# Altium PCB MicroPlayerPCB.PcbDoc
Units mm, origin at the board's own origin, x right, y up, seen from the top; angles counter-clockwise.
Board outline 26 x 30 mm, 4 copper layers (Top Layer 1, Top Layer 2, Bottom Layer 2, Bottom Layer 1), stack 0.682 mm thick; 71 components, 67 nets, 303 pads, 148 vias.
Unrouted connection lines stored in the file: 3.
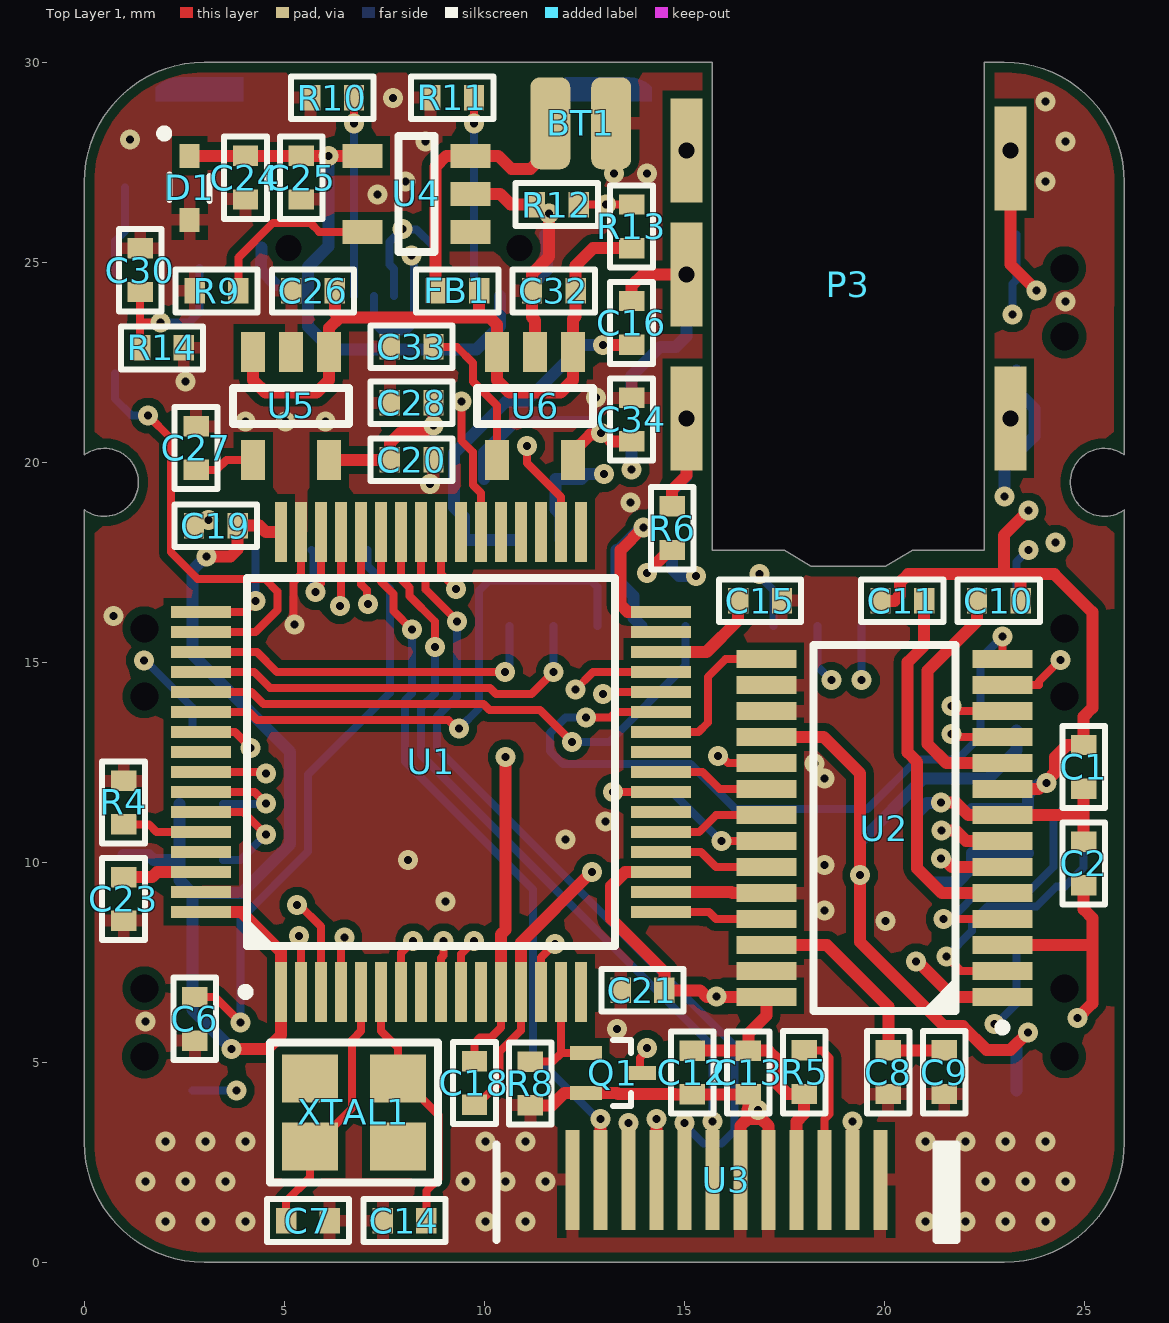
[diagram p0: Top Layer 1 view]
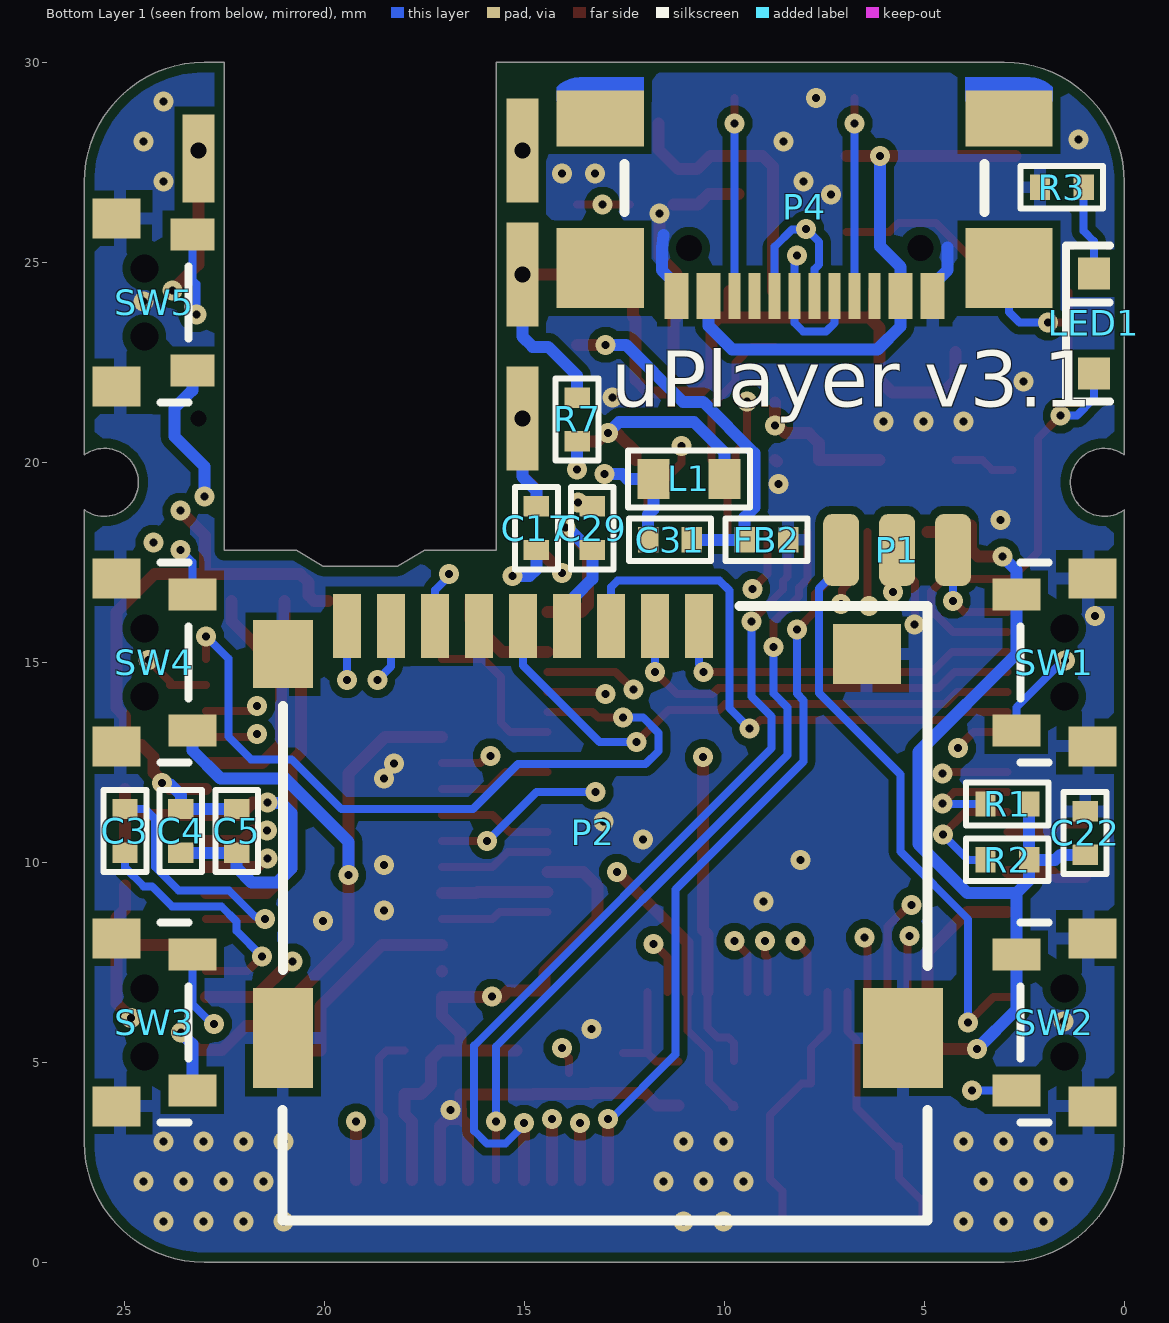
[diagram p1: Bottom Layer 1 view, seen from below]
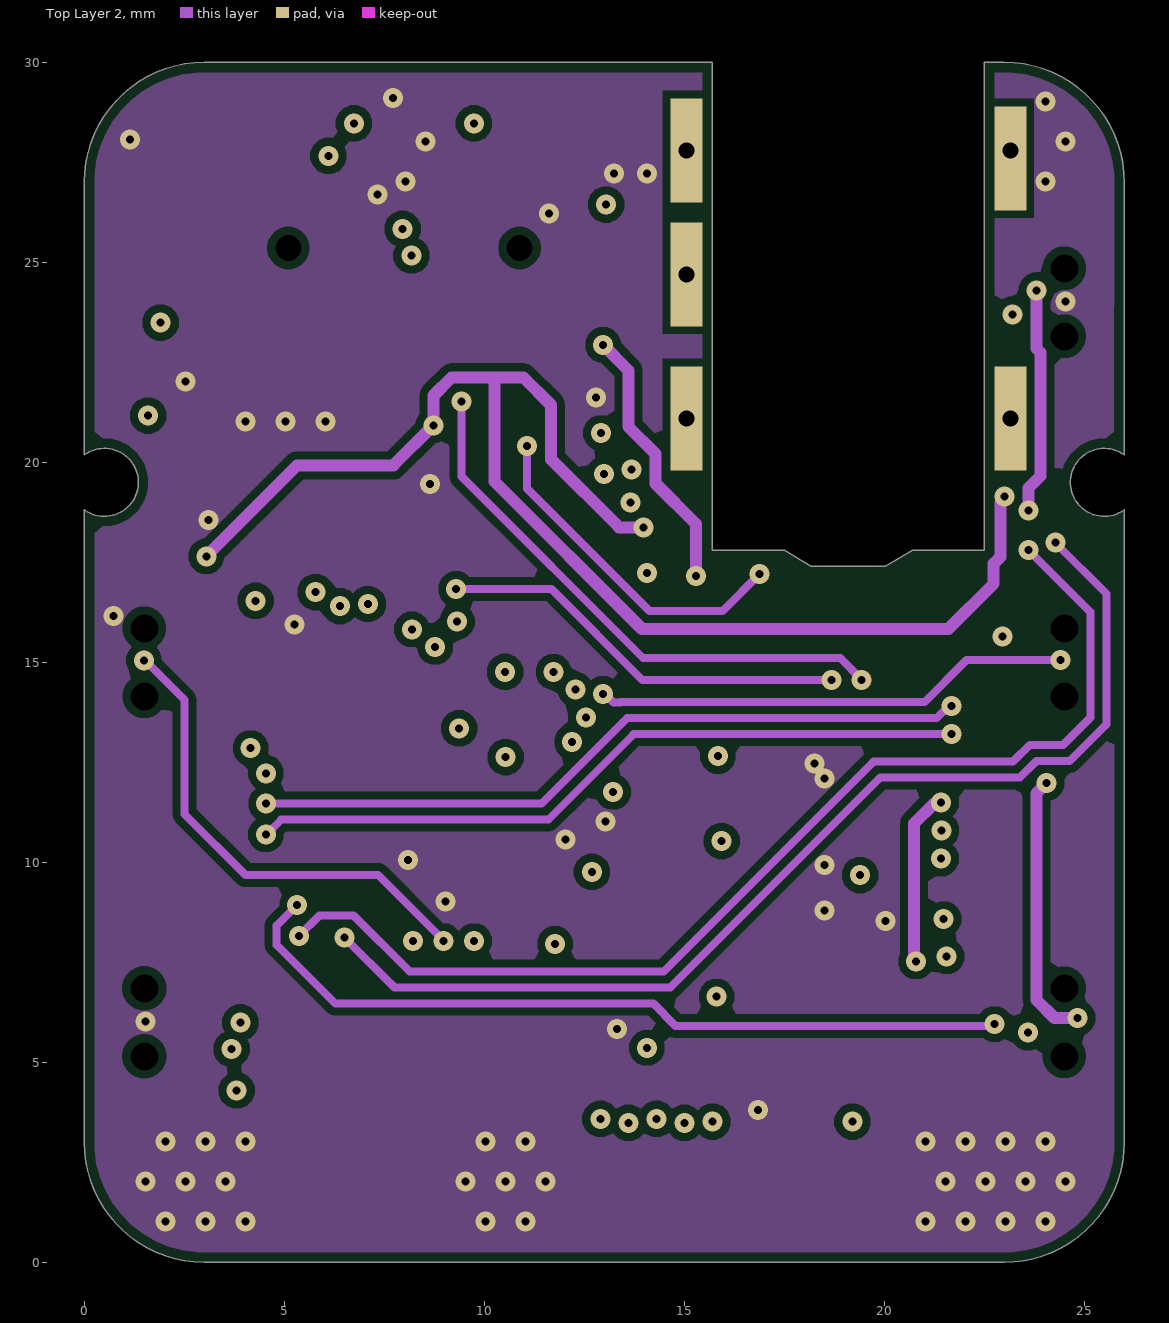
[diagram p2: Top Layer 2]
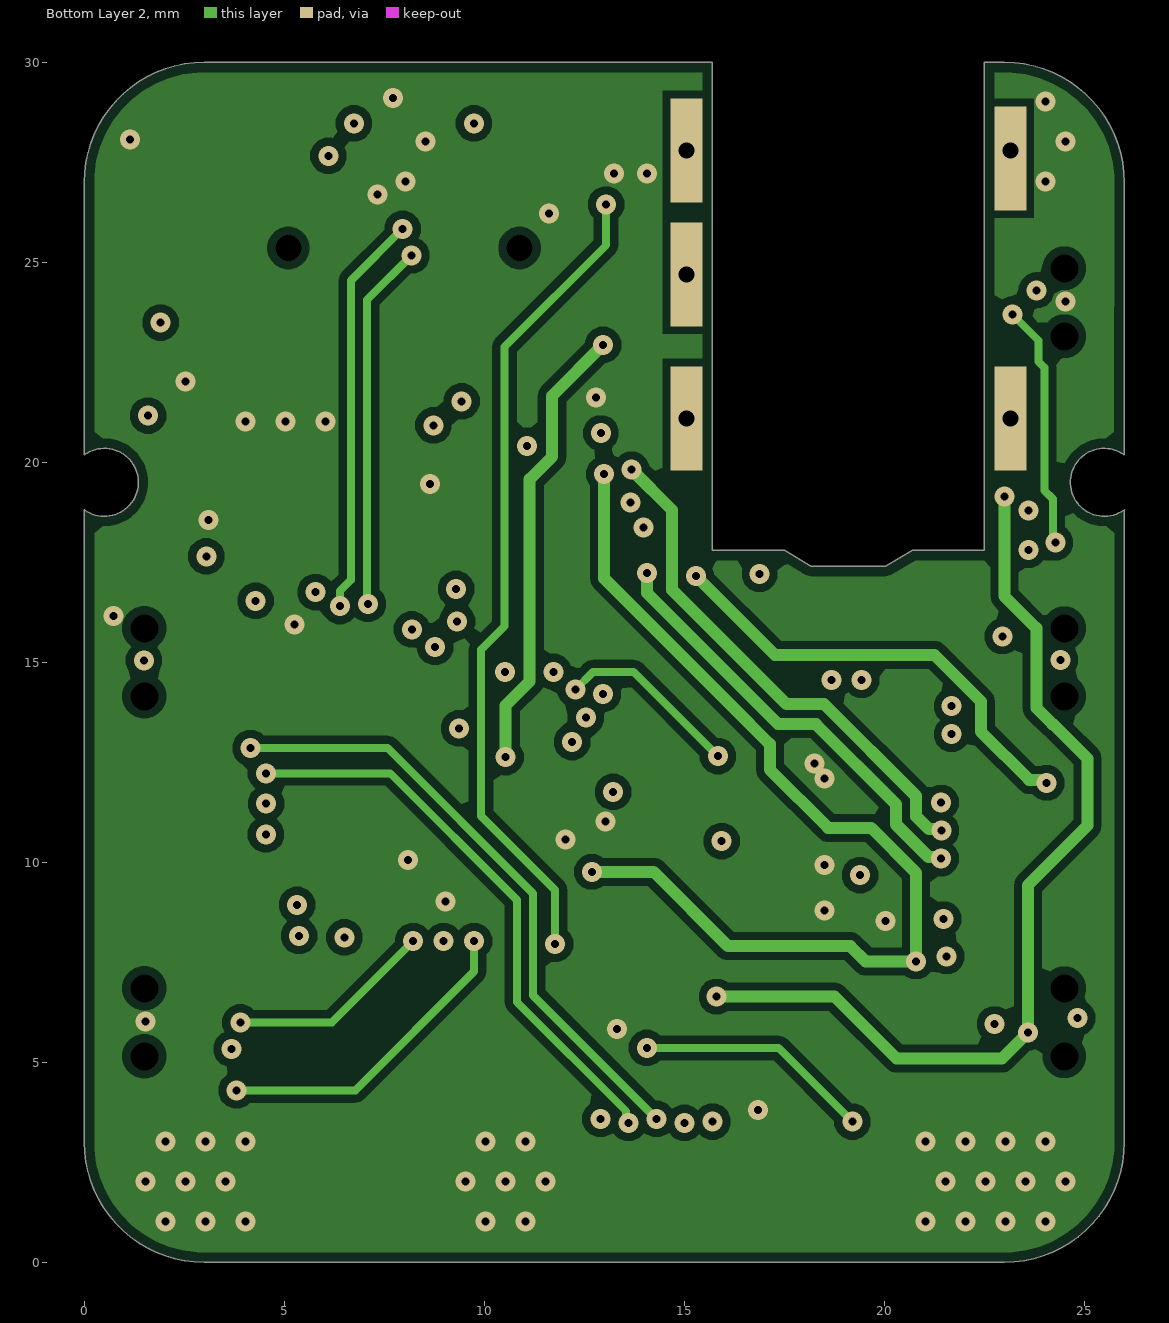
[diagram p3: Bottom Layer 2]
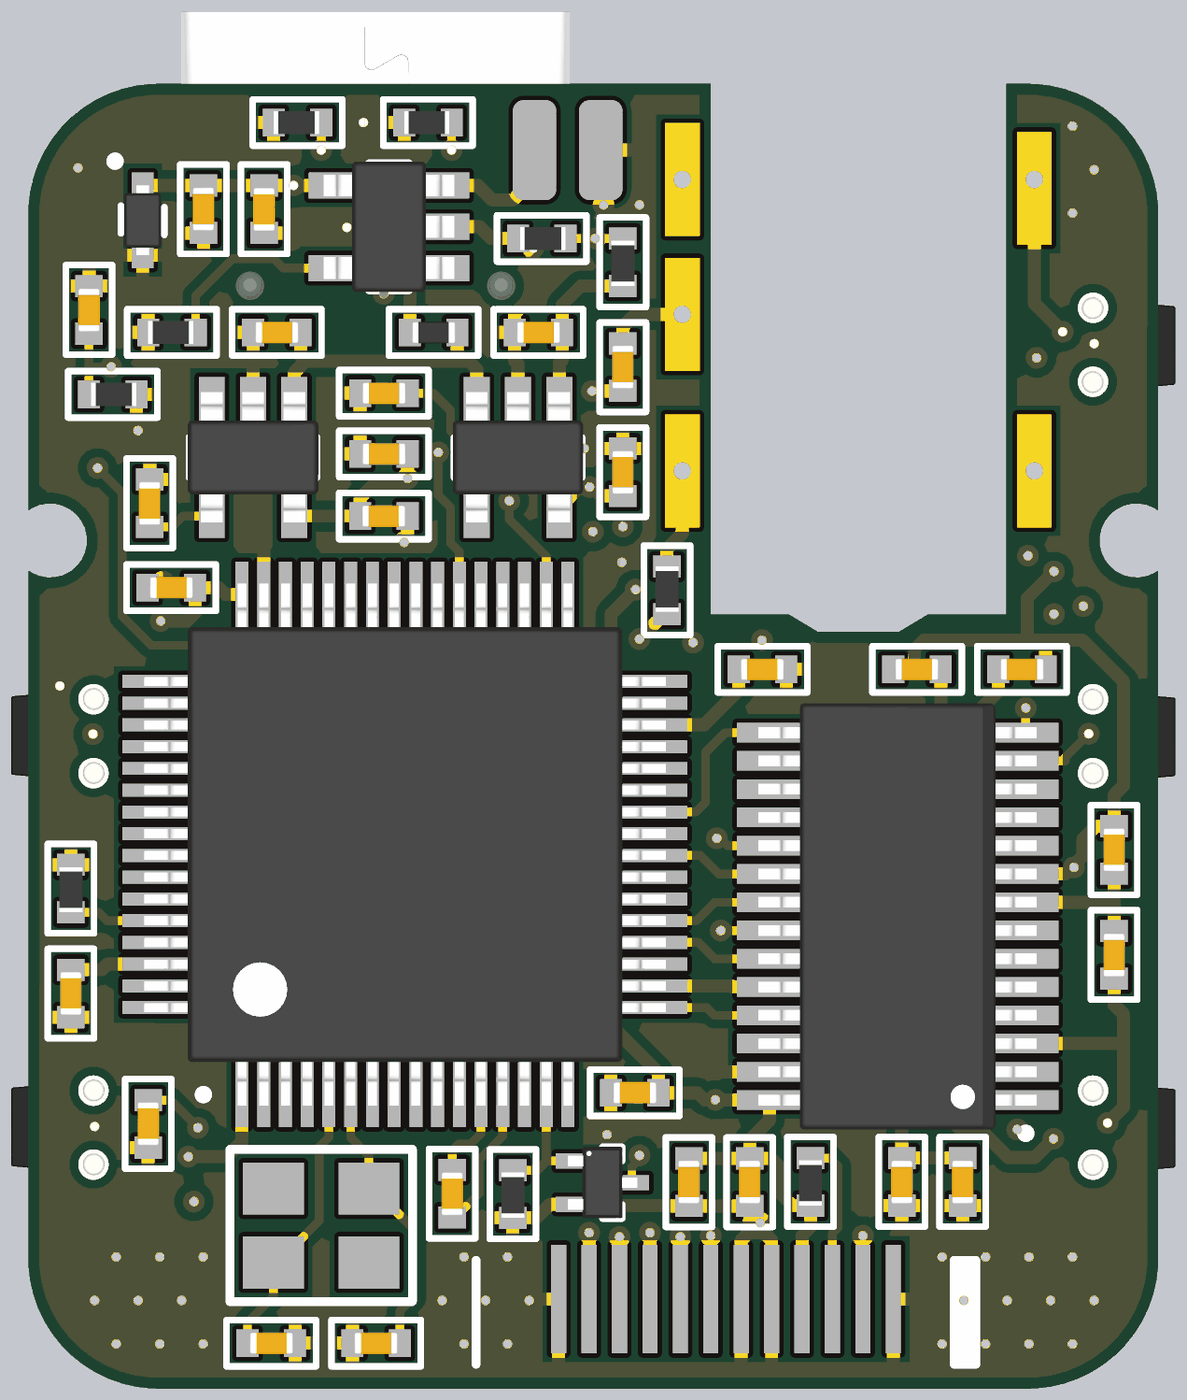
[diagram p4: 3D render of the assembled board from above, using the file's embedded part models]
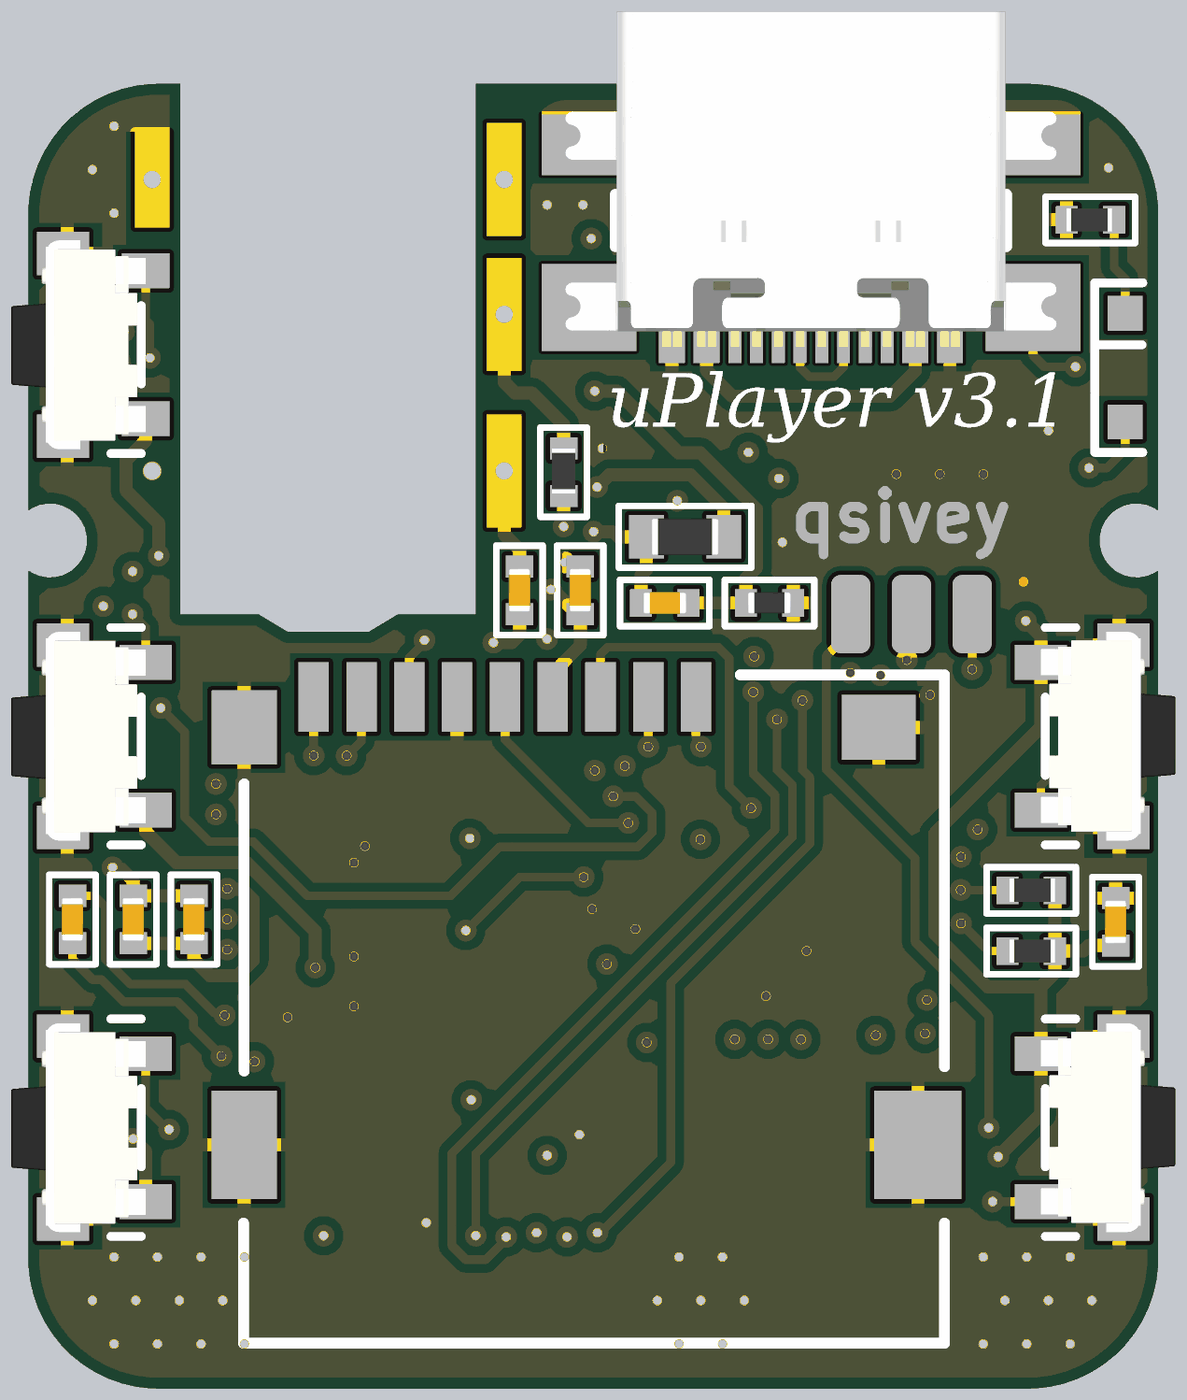
[diagram p5: 3D render of the assembled board from below, using the file's embedded part models]

## Layer stack, top to bottom
Top Solder: solder mask 0.01, Solder Resist, Dk 3.5
Top Layer 1: signal copper 0.035
Dielectric 2: prepreg 0.0711, PP-006, Dk 4.1
Top Layer 2: signal copper 0.035
Dielectric 1: dielectric 0.4, FR-4, Dk 4.8
Bottom Layer 2: signal copper 0.035
Dielectric 3: prepreg 0.0711, PP-006, Dk 4.1
Bottom Layer 1: signal copper 0.035
Bottom Solder: solder mask 0.01, Solder Resist, Dk 3.5

## Board outline
3,0 cw(c3,3) 0,3 0,18.808 0.006,18.808 ccw(c0.5,19.5) 0.006,20.192 0,20.192 0,27 cw(c3,27) 3,30 15.7,30 15.7,17.8 17.5,17.8 18.167,17.4 20.033,17.4 20.7,17.8 22.5,17.8 22.5,30 23,30 cw(c23,27) 26,27 26,20.192 25.994,20.192 ccw(c25.5,19.5) 25.994,18.808 26,18.808 26,3 cw(c23,3) 23,0

## Design rules (kind name [scope] priority, off if disabled: settings)
AssemblyTestPointUsage [All] p1 off:
AssemblyTestpoint [All] p1 off: testpointundercomponent=TRUE minsize=1.016 maxsize=2.54 preferedsize=1.524 minholesize=0 maxholesize=1.016 preferedholesize=0.813 testpointgrid=0.025 usegrid=TRUE gridtolerance=0 allowsidetop=TRUE allowsidebottom=TRUE
BoardOutlineClearance [All] p1: gap=0.25 ignorepadtopadclearanceinfootprint=FALSE
Clearance [All] p1: gap=0.2 ignorepadtopadclearanceinfootprint=FALSE
ComponentClearance [All] p1 off: gap=0 collisioncheckmode=3 verticalgap=0 showdistances=FALSE
DiffPairsRouting [All] p1 off: maxlimit=0.254 minlimit=0.254 mostfreqgap=0.254 toplayer_minwidth=0.381 toplayer_maxwidth=0.381 toplayer_prefwidth=0.381 midlayer1_minwidth=0.381 midlayer1_maxwidth=0.381 midlayer1_prefwidth=0.381 midlayer2_minwidth=0.381 midlayer2_maxwidth=0.381 midlayer2_prefwidth=0.381 bottomlayer_minwidth=0.381 bottomlayer_maxwidth=0.381 bottomlayer_prefwidth=0.381 maxuncoupledlength=12.7
FabricationTestPointUsage [All] p1 off: valid=0 allowmultiple=FALSE
FabricationTestpoint [All] p1 off: side=3 testpointundercomponent=TRUE minsize=1.016 maxsize=2.54 preferedsize=1.524 minholesize=0 maxholesize=1.016 preferedholesize=0.813 testpointgrid=0.025 allowsidetop=TRUE allowsidebottom=TRUE usegrid=TRUE gridtolerance=0
FanoutControl Fanout_BGA [IsBGA] p1 off: bgadir=Out bgaviamode=Centered fanoutstyle=Auto fanoutdirection=Alternating viagrid=0.025 // Fanout_BGA (Default Rule)
Height [All] p1: minheight=0 maxheight=100 prefheight=0.5
HoleSize [All] p1: absolutevalues=TRUE maxlimit=100 minlimit=0.2 maxpercent=80.000 minpercent=20.000
HoleToHoleClearance [All] p1: gap=0.2 allowstackedmicrovias=TRUE
MinimumAnnularRing [All] p1: minimumring=0.15
MinimumSolderMaskSliver [All] p1: minsoldermaskwidth=0
PlaneClearance [All] p1: clearance=0.3
PlaneConnect [All] p1: planeconnectstyle=Relief reliefexpansion=0.5 reliefentries=4 reliefconductorwidth=0.3 reliefairgap=0.3
PolygonConnect PolygonConnectVias [InNet('DGND') vs isVia] p1: connectstyle=Direct reliefconductorwidth=0.254 reliefentries=4 polygonreliefangle="90 Angle" airgapwidth=0.254
PolygonConnect [All] p2: connectstyle=Relief reliefconductorwidth=0.3 reliefentries=4 polygonreliefangle="90 Angle" airgapwidth=0.2
RoutingCorners [All] p1: cornerstyle=45-Degree minsetback=0.635 maxsetback=0.635
RoutingVias [All] p1: holewidth=0.4 width=0.8 viastyle="Through Hole" minholewidth=0.2 minwidth=0.5 maxholewidth=0.5 maxwidth=1
SMDEntry [All] p1: side=TRUE corner=TRUE anyangle=FALSE
SMDNeckDown [All] p1: percent=100.000
SMDToCorner [All] p1: distance=39370
SilkToSilkClearance [All] p1: silktosilkclearance=0.2
SilkToSolderMaskClearance [IsPad] p1: minsilkscreentomaskgap=0.03 clearancetoexposedcopper=FALSE
SolderMaskExpansion SolderMaskExpansionVias [isVia] p1: expansion=0.102 istentingtop=TRUE
SolderMaskExpansion [All] p2: expansion=0.102 istentingtop=FALSE
Width [All] p1: maxlimit=1 minlimit=0.2 preferedwidth=0.3
10 further rules are at their usual default settings.

## Components (designator, comment, footprint, x,y, rotation, side; value= is the part's Value field where it differs from the comment)
BT1 "3.7V" _2-PAD-SM 11.649,28.476 r0 top
C1 "10uF" C0402 24.984,11.839 r90 top
C2 "100nF" C0402 24.984,10.518 r270 top
C3 "2.2uF" C0402 24.984,10.239 r90 bottom
C4 "10uF" C0402 23.587,10.239 r90 bottom
C5 "100nF" C0402 22.19,10.239 r90 bottom
C6 "100nF" C0402 2.759,5.54 r90 top
C7 "12pF" C0402 5.045,1.044 r0 top
C8 "10uF" C0402 20.1,5.3 r270 top
C9 "100nF" C0402 21.5,5.3 r270 top
C10 "10uF" C0402 22.317,16.538 r0 top
C11 "2.2uF" C0402 20.996,16.538 r180 top
C12 "10uF" C0402 15.2,4.2 r90 top
C13 "100nF" C0402 16.6,4.2 r90 top
C14 "12pF" C0402 8.55,1.044 r180 top
C15 "2.2uF" C0402 17.44,16.538 r180 top
C16 "2.2nF" C0402 13.681,22.939 r90 top
C17 "2.2nF" C0402 14.697,17.808 r90 bottom
C18 "100nF" C0402 9.754,5.029 r270 top
C19 "100nF" C0402 2.743,18.415 r0 top
C20 "100nF" C0402 8.728,20.061 r180 top
C21 "100nF" C0402 13.408,6.8 r0 top
C22 "100nF" C0402 0.981,11.28 r270 bottom
C23 "2.2uF" C0402 0.981,8.537 r90 top
C24 "100nF" C0402 4.029,26.571 r90 top
C25 "1uF" C0402 5.426,27.663 r270 top
C26 "1uF" C0402 5.172,24.285 r0 top
C27 "10nF" C0402 2.794,20.904 r270 top
C28 "1uF" C0402 7.636,21.491 r0 top
C29 "2.2uF" C0402 13.3,17.808 r90 bottom
C30 "100nF" C0402 1.397,25.349 r270 top
C31 "100nF" C0402 11.903,18.062 r180 bottom
C32 "100nF" C0402 11.192,24.285 r0 top
C33 "10nF" C0402 7.636,22.888 r0 top
C34 "1uF" C0402 13.681,21.618 r270 top
D1 "PESD5V0S1UB" SOD-523 2.632,26.063 r90 top
FB1 "EPZ1005E221-1R2T" L0402 8.779,24.285 r0 top value=100uH
FB2 "EPZ1005E221-1R2T" L0402 8.398,18.062 r0 bottom value=100uH
L1 "10uH" L0603 9.998,19.586 r0 bottom
LED1 "TO-2106BY-SWG" LED-2106-R/A 0.762,22.225 r90 bottom
P1 "P3" _3-PAD-SM 3.902,17.808 r0 bottom
P2 "microSD Card Holder" L-KLS1-TF-003 10.633,15.903 r0 bottom
P3 "ST-033" _3-PAD-TH 25.282,16.651 r270 top
P4 "USB4110-GF-A" USB-TYPE-C 4.791,24.158 r0 bottom
Q1 "2SK3019TL" SOT-416FL 12.538,5.235 r0 top
R1 "2.2K" R0402 2.39,11.459 r0 bottom
R2 "2.2K" R0402 2.39,10.062 r0 bottom
R3 "1K" R0402 2.096,26.872 r180 bottom
R4 "10K" R0402 0.982,10.962 r90 top
R5 "160" R0402 17.999,4.219 r90 top
R6 "470" R0402 14.696,18.888 r270 top
R7 "470" R0402 13.682,21.606 r270 bottom
R8 "47K" R0402 11.151,3.937 r90 top
R9 "10K" R0402 2.771,24.284 r0 top
R10 "5.1K" R0402 5.661,29.11 r0 top
R11 "5.1K" R0402 8.661,29.11 r0 top
R12 "100K" R0402 12.348,26.445 r180 top
R13 "100K" R0402 13.682,25.364 r90 top
R14 "1M" R0402 2.477,22.861 r180 top
SW1 "" BUT-SMD-4X3.5X2MM#1 2.7,16.7 r270 bottom
SW2 "" BUT-SMD-4X3.5X2MM#1 2.7,7.7 r270 bottom
SW3 "" BUT-SMD-4X3.5X2MM#1 23.3,4.3 r90 bottom
SW4 "" BUT-SMD-4X3.5X2MM#1 23.3,13.3 r90 bottom
SW5 "" BUT-SMD-4X3.5X2MM#2 23.3,22.3 r90 bottom
U1 "STM32H563RIT6" LQFP64 4.918,6.759 r90 top
U2 "PCM5142" TSSOP28 22.952,6.632 r180 top
U3 "ST7789" 1.3INCH_LCD_WELDED 19.904,2.06 r180 top
U4 "STC4054" SOT-23-5 9.65,25.763 r180 top
U5 "LD3985M33R" SOT-23-5 6.122,22.761 r270 top
U6 "LD3985M33R" SOT-23-5 12.218,22.761 r270 top
XTAL1 "16 MHz" 7U 5.039,5.1 r0 top

## Footprints (in the part's own frame and the unit in brackets; to place one, negate y for a bottom-side part, rotate by r counter-clockwise, add the part's x,y. Pads: shape width x height; smd on the part's side, far side on the other; paste and mask are expansions set on the pad)
1.3INCH_LCD_WELDED [mm]
  rect 0.35x2.5 smd: 1(0,0) 2(0.7,0) 3(1.4,0) 4(2.1,0) 5(2.8,0) 6(3.5,0) 7(4.2,0) 8(4.9,0) 9(5.6,0) 10(6.3,0) 11(7,0) 12(7.7,0)
  silkscreen extent -1.9,-0.89 9.6,1.5
7U [mm] "7U Series SMD Crystal Units"
  rect 1.4x1.2 smd: 0(0.6,-0.5) 0(2.8,-2.2) 1(0.6,-2.2) 2(2.8,-0.5)
  silkscreen extent -0.4,-3.1 3.8,0.4
_2-PAD-SM [mm]
  rrect50% 1x2.3 smd: 1(0,0) 2(1.524,0)
_3-PAD-SM [mm]
  rrect50% 0.9x1.8 smd: 1(0.381,0) 2(1.778,0) 3(3.175,0)
_3-PAD-TH [mm]
  rect 2.6x0.8 hole 0.4: 1(-4.449,-10.232) 2(-8.049,-10.232)
  rect 2.6x0.8 / inner rect 2.6x0.8 / far side rect 2.2x0.8 hole 0.4 copper offset 0.2,0: 3(-11.149,-2.132)
BUT-SMD-4X3.5X2MM#1 [mm]
  rect 1x1.2 smd: 0(-0.4,1.9) 0(3.8,1.9)
  rect 0.8x1.2 smd: 1(0,0) 2(3.4,0)
  round 0 hole 0.7 unplated: ""(0.85,1.2) ""(2.55,1.2)
  silkscreen extent -0.8,0.1 4.2,0.8, body extent -0.7,0 4.1,3.09, height 1.9
BUT-SMD-4X3.5X2MM#2 [mm]
  rect 1x1.2 smd: 0(-0.4,1.9) 0(3.8,1.9)
  rect 0.8x1.1 smd: 1(0,0) 2(3.4,0)
  round 0 hole 0.7 unplated: ""(0.85,1.2) ""(2.55,1.2)
  silkscreen extent -0.8,0.1 2.6,0.8, body extent -0.7,0 4.1,3.09, height 1.9
C0402 [mil]
  rect 20x25 smd: 1(0,0) 2(43,0)
  silkscreen extent -19,-21 62,21, body extent 2,-10 41,10, height 14
L0402 [mil]
  rect 20x25 smd: 1(0,0) 2(43,0)
  silkscreen extent -19,-21 62,21, body extent 2,-10 41,10, height 14
L0603 [mm]
  rect 0.8x1 smd: 1(0,0) 2(1.778,0)
  silkscreen extent -0.64,-0.71 2.41,0.71, body extent 0.11,-0.43 1.66,0.43, height 0.45
L-KLS1-TF-003 [mm] "uSD Card Slot"
  rect 2x2.5 smd: 0(-5.1,10.3)
  rect 1.7x1.5 smd: 0(-4.2,0.7)
  rect 1.5x1.7 smd: 0(10.4,0.7)
  rect 1.5x2.5 smd: 0(10.4,10.3)
  rect 0.7x1.6 smd: 1(0,0) 2(1.1,0) 3(2.2,0) 4(3.3,0) 5(4.4,0) 6(5.5,0) 7(6.6,0) 8(7.7,0) 9(8.8,0)
  silkscreen extent -5.71,-0.51 10.41,14.86, body extent -5.71,-0.34 10.39,16.71, height 1.95
LED-2106-R/A [mm]
  rect 0.8x0.8 smd: 1(0,0) 2(2.5,0)
  silkscreen extent -0.7,-0.41 3.2,0.7
LQFP64 [mm]
  rect 1.5x0.3 smd: 1(0,0) 2(0,-0.5) 3(0,-1) 4(0,-1.5) 5(0,-2) 6(0,-2.5) 7(0,-3) 8(0,-3.5) 9(0,-4) 10(0,-4.5) 11(0,-5) 12(0,-5.5) 13(0,-6) 14(0,-6.5) 15(0,-7) 16(0,-7.5) 33(11.5,-7.5) 34(11.5,-7) 35(11.5,-6.5) 36(11.5,-6) 37(11.5,-5.5) 38(11.5,-5) 39(11.5,-4.5) 40(11.5,-4) 41(11.5,-3.5) 42(11.5,-3) 43(11.5,-2.5) 44(11.5,-2) 45(11.5,-1.5) 46(11.5,-1) 47(11.5,-0.5) 48(11.5,0)
  rect 0.3x1.5 smd: 17(2,-9.5) 18(2.5,-9.5) 19(3,-9.5) 20(3.5,-9.5) 21(4,-9.5) 22(4.5,-9.5) 23(5,-9.5) 24(5.5,-9.5) 25(6,-9.5) 26(6.5,-9.5) 27(7,-9.5) 28(7.5,-9.5) 29(8,-9.5) 30(8.5,-9.5) 31(9,-9.5) 32(9.5,-9.5) 49(9.5,2) 50(9,2) 51(8.5,2) 52(8,2) 53(7.5,2) 54(7,2) 55(6.5,2) 56(6,2) 57(5.5,2) 58(5,2) 59(4.5,2) 60(4,2) 61(3.5,2) 62(3,2) 63(2.5,2) 64(2,2)
  silkscreen extent -0.1,-8.35 10.35,0.99, body extent -0.25,-9.75 11.75,2.25, height 1.6
R0402 [mil]
  rect 20x25 smd: 1(-0.47,0.04) 2(42.53,0.04)
  silkscreen extent -19,-21 62,21, body extent 0,-10 40,10, height 16
SOD-523 [mm] "SSMini2, SC-79"
  rect 0.6x0.5 smd: 1(0,0) 2(1.6,0)
  silkscreen extent 0.47,-0.5 2.26,0.73, body extent 0,-0.43 1.6,0.43, height 0.6
SOT-23-5 [mm] "SOT-753"
  rect 1x0.6 smd: 1(0,0) 2(0,-0.95) 3(0,-1.9) 4(2.7,-1.9) 5(2.7,0)
  silkscreen extent 0.9,-2.4 1.8,0.5, body extent -0.15,-2.45 2.85,0.55, height 1.2
SOT-416FL [mm] "SC-89 (EMT3)"
  rect 0.8x0.35 smd: 1(0,0) 2(0,-1) 3(1.35,-0.5)
  silkscreen extent 0.67,-1.32 1.12,0.33, body extent -0.13,-1.32 1.48,0.32, height 0.73
TSSOP28 [mm]
  rect 1.5x0.45 smd: 1(0,0) 2(0,-0.65) 3(0,-1.3) 4(0,-1.95) 5(0,-2.6) 6(0,-3.25) 7(0,-3.9) 8(0,-4.55) 9(0,-5.2) 10(0,-5.85) 11(0,-6.5) 12(0,-7.15) 13(0,-7.8) 14(0,-8.45) 15(5.9,-8.45) 16(5.9,-7.8) 17(5.9,-7.15) 18(5.9,-6.5) 19(5.9,-5.85) 20(5.9,-5.2) 21(5.9,-4.55) 22(5.9,-3.9) 23(5.9,-3.25) 24(5.9,-2.6) 25(5.9,-1.95) 26(5.9,-1.3) 27(5.9,-0.65) 28(5.9,0)
  silkscreen extent -0.1,-8.8 4.73,0.86, body extent -0.25,-9.13 6.15,0.67, height 1.2
USB-TYPE-C [mm]
  rect 2.18x1.4 smd mask+0.07: 0(-1.91,-4.442) 0(8.31,-4.442)
  rect 2.18x2 smd mask+0.07: 0(-1.91,-0.7) 0(8.31,-0.7)
  rect 0.6x1.15 smd mask+0.07: 1(0,0) 2(0.8,0) 11(5.6,0) 12(6.4,0)
  rect 0.3x1.15 smd mask+0.07: 3(1.45,0) 4(1.95,0) 5(2.45,0) 6(2.95,0) 7(3.45,0) 8(3.95,0) 9(4.45,0) 10(4.95,0)
  round 0 hole 0.65 unplated: ""(0.31,-1.2) ""(6.09,-1.2)
  silkscreen extent -1.3,-3.3 7.7,-2.1, body extent -2.45,-7.5 8.85,0.2, height 3.26

## Part data
BT1: library part Battery, Link=https://www.chipdip.ru/product/robiton-lp303030, Name=LP303030
C1 C3 C4 C6 C8 C10 C11 C12 C15 C16 C17 C18 C19 C20 C21 C22 C23 C24 C25 C26 C27 C28 C29 C30 C32 C33 C34: library part Cap, Case=DNP, Part Number=N/A, Tolerance=5%, Voltage=250V
C2 C5 C7 C9 C13 C14 C31: library part Cap, Case=0603, Tolerance=5%, Voltage=250V
D1: library part Suppressor, Case=SOD-523, Link=https://www.chipdip.ru/product/pesd5v0s1ub, Name=PESD5V0S1UB
FB1 FB2: library part "Ferrite Bead", Case=0402, Name=EPZ1005E221-1R2T
L1: library part Inductor, Case=0805, Part Number=LQM21FN100N00K, Tolerance=30%, Link=https://www.chipdip.ru/product/lqm21fn100n
LED1: library part LED, Case=DNP, Part Number=N/A, Name=TO-2106BY-SWG
P1: Case=DNP, Part Number=N/A
P2: library part MicroSD-CD1, Name="microSD Card Holder"
P3: library part "AJack Socket Stereo", Name=ST-033
P4: library part "USB Type C with 0", Case=DNP, Part Number=N/A, Name=USB4110-GF-A
Q1: library part MOSFET-N, Case=SOT-416, Link=https://www.chipdip.ru/product/2n7002-umw, Name=2SK3019TL
R1 R2 R4 R5 R6 R7 R8 R9 R10 R11 R12 R13 R14: library part Res, Power=0.125W, Tolerance=5%
R3: library part Res, Case=0603, Power=0.125W, Tolerance=5%
SW1 SW2 SW3 SW4 SW5: library part Button
U1: library part STM32H563Rxxx, Case=DNP, Part Number=N/A, Name=STM32H563RIT6
U2: library part PCM514x, "2-VRMS DirectPath™, 112/106-dB Audio Stereo DAC With 32-bit, 384-kHz PCM Interface", Case=DNP, Part Number=N/A, Name=PCM5142
U3: library part "1.3inch TFT LCD 12-pin", "135x240 Display", Part Number=N/A, Name=ST7789
U4: "800mA Standalone linear Li-Ion Battery charger with thermal regulation", Case=SOT-23-5, Part Number=N/A, Name=STC4054
U5 U6: library part LD3985, "Ultra low drop and low noise BiCMOS voltage regulators, 150 mA", Case=SOT-23-5, Link=https://www.chipdip.ru/product/ld3985m33r, Name=LD3985M33R
XTAL1: library part Crystal, Case=7U, Part Number=N/A, Tolerance=0.001%, Name=SJK-7U

## Free pads (board coordinates)
  rect 0.8x2.6 hole 0.4: ""(15.05,27.8)
  rect 0.8x2.6 / inner rect 0.8x2.6 / far side rect 0x0 hole 0.4: ""(23.15,21.1)

## Via types
v1: diameter 0.5, hole 0.2, Top Layer 1 to Bottom Layer 1, tented both sides, 148 vias

## Nets (pads, with @x,y where several pads share a name; then routed paths per layer and width w, separated by ;. In a path a pad name is that pad's centre, name@x,y a point inside that pad or via, vN(x,y) a via of type N, cw(c..) or ccw(c..) an arc to the next point about the centre after c; other vN are vias at no path point)
+3.3V: C12.2 C13.2 C19.2 C20.2 C21.2 C22.2 C28.2 C29.1 P2.4 R1.1 R2.1 R5.1 SW1.1 SW2.1 SW3.1 SW4.1 SW5.1 U1.1 U1.19 U1.32 U1.48 U1.64 U2.18 U2.28 U3.4 U5.5 | length 134.9
  Top Layer 1 w0.3: U1.64 3.925,8.759 4.918,7.766 U1.1 4.918,5.68 4.57,5.332 v1(3.682,5.332) ; v1(3.048,17.65) 3.66,17.65 3.835,17.826 C19.2 4.382,18.415 4.538,18.259 U1.48 ; U5.5 C20.2 7.636,20.479 7.886,20.729 8.477,20.729 8.674,20.926 v1(8.728,20.926) C28.2 ; v1(13.975,18.372) 13.408,17.806 13.408,16.435 13.584,16.259 U1.32 ; U1.19 13.523,9.759 13.173,9.409 13.173,8.588 14.5,7.261 C21.2 15.397,6.8 15.565,6.632 v1@15.8,6.632 ; C12.2 17.102,5.292 17.331,5.063 17.331,4.457 17.581,4.207 R5.1 17.998,3.71 17.804,3.516 U3.4 ; v1(15.808,6.64) v1@15.8,6.632 ; C13.2@16.6,5.3 16.6,5.716 17.052,6.168 U2.28 v1@15.8,6.632 ; U2.18 18.484,13.132 19.396,12.22 v1(19.396,9.68) 19.396,8.004 21.496,5.904 21.962,5.904 22.555,5.311 23.155,5.311 v1(23.587,5.743)
  Top Layer 2 w0.3: v1(3.048,17.65) 5.322,19.925 7.726,19.925 v1(8.728,20.926) 8.728,21.671 9.183,22.126 10.16,22.126 ; v1(13.975,18.372) 13.371,18.372 11.668,20.075 11.668,21.433 10.975,22.126 10.16,22.126 ; v1(23,19.15) 23,19.096 22.9,18.996 22.9,17.634 22.734,17.468 22.734,16.966 21.602,15.834 13.942,15.834 10.252,19.524 10.252,22.034 10.16,22.126
  Bottom Layer 2 w0.3: v1(15.808,6.64) 18.76,6.64 20.3,5.1 22.944,5.1 v1(23.587,5.743) 23.587,9.426 25.078,10.917 25.078,12.598 24.226,13.45 24.21,13.45 23.8,13.86 23.8,15.852 23,16.652 v1(23,19.15)
  Bottom Layer 1 w0.3: C22.2 1.601,10.188 1.728,10.061 R2.1 ; R1.1 R2.1 ; v1(3.048,17.65) 2.7,17.302 SW1.1 2.7,15.203 5.145,12.758 5.145,10.455 3.921,9.231 2.7,9.231 ; v1(3.682,5.332) 2.7,6.315 SW2.1 2.7,9.231 ; P2.4 13.733,16.103 13.733,16.653 13.3,17.086 C29.1 13.363,17.808 13.928,18.372 v1(13.975,18.372) ; v1(19.396,9.68) 19.396,10.514 20.976,12.094 22.594,12.094 23.3,12.8 SW4.1 ; v1(23,19.15) 23,19.9 23.577,20.477 23.577,20.479 23.75,20.651 23.75,21.349 23.3,21.799 SW5.1 ; SW3.1 23.3,5.456 v1(23.587,5.743) ; R2.1 2.378,9.553 2.7,9.231
+3.3VA: C1.1 C2.1 C4.1 C5.1 C18.2 C31.1 L1.2 U1.13 U2.1 U2.8 | length 52.5
  Top Layer 1 w0.2: C18.2@9.744,3.889 C18.2@9.807,3.889 ; C18.2 9.817,3.937 10.379,4.499 10.379,5.262 10.918,5.801 U1.13
  Top Layer 1 w0.3: U1.13 10.918,7.992 v1(12.687,9.761) ; v1(20.793,7.521) 20.833,7.521 21.722,6.632 U2.1 ; v1(21.422,11.494) 21.79,11.494 22.102,11.182 U2.8 24.981,11.182 24.984,11.179 ; C2.1 24.984,11.179 ; C1.1 24.984,11.179
  Top Layer 2 w0.3: v1(20.793,7.521) 20.755,7.559 20.755,7.701 20.745,7.71 20.745,10.972 21.229,11.456 21.384,11.456 v1(21.422,11.494)
  Bottom Layer 2 w0.3: v1(12.687,9.761) 14.235,9.761 16.091,7.905 19.15,7.905 19.534,7.521 v1(20.793,7.521) 20.793,9.738 19.67,10.861 18.596,10.861 17.139,12.318 17.139,12.953 16.157,13.934 12.991,17.101 v1(12.991,19.704)
  Bottom Layer 1 w0.3: C31.1 11.903,18.697 11.776,18.824 L1.2 12.429,19.586 12.546,19.704 v1(12.991,19.704) ; v1(21.422,11.494) 21.412,11.484 21.073,11.484 20.823,11.234 20.823,9.845 21.174,9.494 21.821,9.494 22.19,9.863 C5.1 C4.1
AGND: C1.2 C2.2 C4.2 C5.2 C10.2 C11.2 C16.1 C17.1 C18.1 C31.2 FB2.2 P3.3 U1.12 U2.3 U2.9 | length 87
  Top Layer 1 w0.2: C18.1 9.754,5.479 9.892,5.618 10.169,5.618 10.418,5.867 U1.12
  Top Layer 1 w0.3: U1.12 10.418,8.199 10.533,8.314 v1(10.533,12.628) ; v1(12.968,22.935) 12.972,22.939 C16.1 ; C11.2 20.258,16.538 20.392,16.672 20.392,17 20.597,17.206 22.987,17.206 ; U2.3 25.131,7.932 25.2,8.001 ; U2.9 23.853,11.832 24.006,11.985 v1(24.06,11.985) ; P3.3 23.15,24.95 v1(23.8,24.3) ; C10.2 23.409,17.129 23.333,17.206 ; v1(23.6,18.789) 22.987,18.176 22.987,17.206 ; v1@24.06,12.062 24.084,12.062 24.266,12.245 24.266,12.631 24.566,12.931 C1.2 24.984,13.644 25.2,13.86 25.2,16.256 24.25,17.206 23.333,17.206 ; v1(24.833,6.106) 25.2,6.473 25.2,8.001 ; C2.2 24.984,8.824 25.2,8.608 25.2,8.001 ; 22.987,17.206 23.333,17.206
  Top Layer 2 w0.3: v1(12.968,22.935) 13.601,22.302 13.601,20.89 14.281,20.21 14.281,19.471 15.297,18.455 v1(15.297,17.153) ; v1(23.6,18.789) 23.6,19.355 23.9,19.655 23.9,22.748 23.8,22.848 v1(23.8,24.3) ; v1(24.06,11.985) 23.8,11.724 23.8,6.56 24.254,6.106 v1(24.833,6.106)
  Bottom Layer 2 w0.3: v1(10.533,12.628) 10.533,13.922 11.133,14.523 11.133,19.578 11.697,20.142 11.697,21.664 v1(12.968,22.935) ; v1(15.297,17.153) 17.27,15.18 21.26,15.18 22.414,14.026 22.414,13.268 23.619,12.062 23.928,12.062 24.006,11.985 v1(24.06,11.985)
  Bottom Layer 1 w0.3: C31.2 FB2.2 9.49,18.627 9.248,18.869 9.248,20.231 10.531,21.514 11.037,21.514 12.458,22.935 v1(12.968,22.935) ; C17.1@14.76,17.808 C17.1 14.697,17.329 14.873,17.153 v1(15.297,17.153) ; C5.2 C4.2 23.587,11.685 23.848,11.946 24.022,11.946 v1(24.06,11.985)
BACK: SW3.2 U1.3 | length 24.5
  Top Layer 1 w0.2: v1(5.322,8.936) 5.374,8.936 5.918,8.392 U1.3
  Top Layer 2 w0.2: v1(5.322,8.936) 4.809,8.424 4.809,7.932 6.274,6.467 14.227,6.467 14.783,5.911 22.712,5.911 v1(22.758,5.957)
  Bottom Layer 1 w0.2: v1(22.758,5.957) 22.8,5.957 23.3,6.457 SW3.2
BAT_LEVEL: R12.1 R13.2 U1.14 | length 23.2
  Top Layer 1 w0.2: U1.14 11.418,7.618 v1@11.759,7.959 ; R12.1 v1(13.046,26.444) R13.2
  Bottom Layer 2 w0.2: v1(11.768,7.959) 11.768,9.307 9.918,11.157 9.918,15.315 10.506,15.903 10.506,22.888 13.046,25.428 v1(13.046,26.444)
BOOT: R4.1 U1.60 | length 2
  Top Layer 1 w0.2: R4.1 1.616,10.95 1.807,10.759 U1.60
DAC_GPIO3: U1.26 U2.15 | length 4.1
  Top Layer 1 w0.2: U1.26 15.355,13.259 15.586,13.49 15.586,14.633 16.035,15.082 U2.15
DAC_GPIO4: U1.27 U2.14 | length 18.9
  Top Layer 1 w0.2: v1(12.538,13.617) 13.151,13.617 13.293,13.759 U1.27 ; U2.14 v1(22.952,15.649)
  Bottom Layer 1 w0.2: v1(12.538,13.617) 12.028,13.617 11.646,13.234 11.646,12.779 11.968,12.456 15.155,12.456 16.28,11.331 19.577,11.331 20.821,12.576 21.832,12.576 22.4,13.143 22.4,15.097 v1(22.952,15.649)
DAC_GPIO5: U1.28 U2.13 | length 15.2
  Top Layer 1 w0.2: v1(12.966,14.209) 13.016,14.259 U1.28 ; U2.13 23.863,14.432 23.863,14.519 v1(24.4,15.056)
  Top Layer 2 w0.2: v1(12.966,14.209) 13.021,14.209 13.233,13.997 13.398,13.997 13.404,14.003 21.004,14.003 22.057,15.056 v1(24.4,15.056)
DAC_GPIO6: U1.29 U2.19 | length 8.2
  Top Layer 1 w0.2: v1(12.274,14.316) 12.717,14.759 U1.29 ; v1(15.841,12.653) 15.922,12.653 16.093,12.482 U2.19
  Bottom Layer 2 w0.2: v1(12.274,14.316) 12.717,14.759 13.735,14.759 v1(15.841,12.653)
DAC_XSMT: U1.17 U2.25 | length 2.7
  Top Layer 1 w0.2: U1.17 15.618,8.759 15.795,8.582 U2.25
DGND: BT1.2 C6.1 C7.2 C8.2 C9.2 C12.1 C13.1 C14.2 C15.1 C19.1 C20.1 C21.1 C22.1 C23.1 C24.1 C25.2 C26.1 C27.1 C28.1 C29.2 C30.1 C32.1 C33.1 C34.1 D1.1 FB2.1 P2.0 P2.6 P4.1 P4.12 Q1.2 R3.1 R4.2 R8.1 R9.1 R10.1 R11.1 R12.2 R14.1 SW1.0 SW2.0 SW3.0 SW4.0 SW5.0 U1.18 U1.31 U1.47 U1.63 U2.16 U2.17 U2.24 U2.27 U3.1 U3.5 U3.6 U3.12 U4.2 U5.2 U6.2 | length 23.1
  Top Layer 1 w0.2: v1(5.25,15.951) 5.233,15.968 5.233,17.009 5.418,17.194 U1.47
  Top Layer 1 w0.3: v1(8.648,19.459) v1@8.686,19.497 ; C20.1@8.686,20.019 C20.1 ; U4.2 10.39,26.713 10.66,26.444 R12.2 ; R8.1 11.695,3.925 12.005,4.235 Q1.2 13.318,4.235 13.343,4.21 14.772,4.21 14.783,4.2 C12.1 C13.1 16.6,3.846 16.578,3.824 16.578,3.584 ; U6.2 11.268,23.551 11.192,23.628 C32.1 11.192,24.714 11.617,25.14 v1(11.617,26.219) ; U1.18 16.175,9.259 16.202,9.232 U2.24 ; U3.6 16.404,3.41 16.578,3.584 ; U2.27 U2.27@17.058,7.276 ; U3.5 17.104,3.41 16.93,3.584 16.578,3.584
  Bottom Layer 1 w0.3: 4.426,25.365 4.42,24.804 P4.1@4.791,24.433 ; P4.12 11.191,24.433 11.562,24.804 11.556,25.365 ccw(c10.881,25.358) 11.551,25.438 11.522,25.682
  other v1: 2.026,1.026 3.026,1.026 4.026,1.026 10.026,1.026 11.026,1.026 21.026,1.026 22.026,1.026 23.026,1.026 24.026,1.026 1.526,2.026 2.526,2.026 3.526,2.026 9.526,2.026 10.526,2.026 11.526,2.026 21.526,2.026 22.526,2.026 23.526,2.026 24.526,2.026 2.026,3.026 3.026,3.026 4.026,3.026 10.026,3.026 11.026,3.026 21.026,3.026 22.026,3.026 23.026,3.026 24.026,3.026 16.842,3.813 13.318,5.838 1.526,6.026 20.031,8.537 18.507,8.791 9.026,9.026 18.507,9.934 8.093,10.061 12.03,10.569 13.026,11.026 18.507,12.093 18.253,12.474 0.727,16.157 3.102,18.552 13.658,18.997 4.026,21.026 5.026,21.026 6.026,21.026 12.792,21.618 2.526,22.026 24.526,24.026 7.331,26.698 8.026,27.026 24.026,27.026 13.237,27.217 14.062,27.217 8.526,28.026 24.526,28.026 1.143,28.067 24.026,29.026 7.712,29.111
I2C1_SCL: R1.2 U1.58 U2.12 | length 22.3
  Top Layer 1 w0.2: U1.58 4.252,11.759 v1(4.545,11.466) ; v1(21.682,13.903) 21.763,13.903 21.884,13.782 U2.12
  Top Layer 2 w0.2: v1(4.545,11.466) 11.433,11.466 13.57,13.603 21.304,13.603 21.604,13.903 v1(21.682,13.903)
  Bottom Layer 1 w0.2: R1.2 4.537,11.458 v1(4.545,11.466)
I2C1_SDA: R2.2 U1.59 U2.11 | length 22.7
  Top Layer 1 w0.2: U1.59 3.974,11.259 v1(4.537,10.696) ; v1(21.682,13.203) 21.763,13.203 21.834,13.132 U2.11
  Top Layer 2 w0.2: v1(4.537,10.696) 4.553,10.696 4.923,11.066 11.598,11.066 13.736,13.203 v1(21.682,13.203)
  Bottom Layer 1 w0.2: R2.2 3.902,10.061 v1(4.537,10.696)
I2S1_CK: U1.21 U2.21 | length 2.8
  Top Layer 1 w0.2: U1.21 15.373,10.759 15.796,11.182 U2.21
I2S1_MCK: U1.24 U2.20 | length 2.8
  Top Layer 1 w0.2: U1.24 15.457,12.259 15.884,11.832 U2.20
I2S1_SDO: U1.23 U2.22 | length 5.5
  Top Layer 1 w0.2: v1(13.22,11.759) U1.23 ; v1(15.933,10.532) U2.22
  Bottom Layer 1 w0.2: v1(13.22,11.759) 14.693,11.759 v1@15.933,10.519
I2S1_WS: U1.20 U2.23 | length 2.8
  Top Layer 1 w0.2: U1.20 15.416,10.259 15.793,9.882 U2.23
LCD_CS: U1.41 U3.8 | length 21.7
  Top Layer 1 w0.2: U1.41 8.418,17.148 8.528,17.038 8.528,16.825 9.321,16.032 v1(9.321,16.015)
  Top Layer 1 w0.3: U3.8 v1(15.003,3.488)
  Bottom Layer 1 w0.2: v1(9.321,16.015) 9.321,14.147 8.818,13.644 8.818,12.852 16.254,5.416 16.254,3.287 15.932,2.965 15.476,2.965 15.003,3.438 v1(15.003,3.488)
LCD_DC: U1.42 U3.7 | length 19.7
  Top Layer 1 w0.2: U1.42 7.918,17.082 8.128,16.872 8.128,16.659 8.771,16.017 v1(8.771,15.385) ; v1(15.703,3.516) 15.703,3.497 15.704,3.496 U3.7
  Bottom Layer 1 w0.2: v1(8.771,15.385) 8.771,14.226 8.418,13.873 8.418,12.686 15.704,5.4 v1@15.704,3.515
LCD_RES: U1.43 U3.11 | length 18.7
  Top Layer 1 w0.2: U1.43@7.417,18.258 7.417,17.017 7.728,16.706 7.728,16.282 v1(8.187,15.823)
  Top Layer 1 w0.3: U3.11 v1(12.904,3.584)
  Bottom Layer 1 w0.2: v1(8.187,15.823) 8.187,14.218 8.018,14.049 8.018,12.521 11.218,9.32 11.218,5.201 v1@12.904,3.515
NetBT1_1: BT1.1 FB1.1 U4.3 | length 7.1
  Top Layer 1 w0.3: FB1.1 8.779,27.392 9.05,27.663 10.347,27.663 10.681,27.329 11.152,27.329 11.649,27.826 BT1.1
NetC3_1: C3.1 U2.2 | length 6.4
  Top Layer 1 w0.2: v1(21.555,7.648) 21.921,7.282 U2.2
  Bottom Layer 1 w0.2: v1(21.555,7.648) 22.195,8.288 22.195,8.52 22.576,8.9 23.81,8.9 24.31,9.4 24.515,9.4 24.984,9.869 C3.1
NetC3_2: C3.2 U2.4 | length 6.8
  Top Layer 1 w0.2: v1@21.481,8.605 21.503,8.582 U2.4
  Bottom Layer 1 w0.2: v1@21.481,8.605 21.515,8.639 21.727,8.639 22.387,9.3 23.644,9.3 24.231,9.887 24.231,11.086 24.476,11.331 C3.2
  other v1: 21.481,8.582
NetC8_1: C8.1 C9.1 U2.26 | length 6.2
  Top Layer 1 w0.3: U2.26 18.564,7.932 20.1,6.396 C8.1 C9.1
NetC10_1: C10.1 U2.10 | length 6.2
  Top Layer 1 w0.3: C10.1 22.317,16.03 21.082,14.795 21.082,12.954 21.554,12.482 U2.10
NetC11_1: C11.1 U2.5 | length 9.3
  Top Layer 1 w0.3: C11.1 20.996,15.416 20.582,15.002 20.582,12.747 20.823,12.507 20.823,9.845 21.436,9.232 U2.5
NetC24_2: C24.2 C25.1 D1.2 P4.2 P4.11 U4.4 | length 14.7
  Top Layer 1 w0.3: D1.2@2.726,27.663 C25.1 U4.4
  Bottom Layer 1 w0.3: v1(6.102,27.664) 6.102,25.395 5.591,24.884 5.591,23.397 6.169,22.819 9.802,22.819 10.391,23.408 P4.11
NetC26_2: C26.2 C32.2 FB1.2 R13.1 U5.1 U5.3 U6.1 U6.3 | length 17.9
  Top Layer 1 w0.3: U5.3 4.222,22.053 4.53,21.745 5.807,21.745 6.122,22.06 U5.1 6.122,23.361 6.378,23.618 ; C26.2 6.264,23.732 6.378,23.618 ; 9.871,23.618 FB1.2 ; R13.1 12.716,25.352 12.284,24.92 C32.2 12.284,23.643 12.218,23.577 U6.1 12.218,22.06 11.903,21.745 10.626,21.745 10.318,22.053 U6.3 10.318,23.442 10.142,23.618 6.378,23.618
NetC27_2: C27.2 U5.4 | length 1.5
  Top Layer 1 w0.2: C27.2 3.302,19.812 3.551,20.061 U5.4
NetC30_2: C30.2 P4.0 R14.2 | length 4.1
  Top Layer 1 w0.2: R14.2 1.397,23.558 ; C30.2 1.397,23.558 ; v1(1.905,23.495) 1.46,23.495 1.397,23.558
  Bottom Layer 1 w0.2: v1(1.905,23.495) 2.618,23.495 2.881,23.758 P4.0@2.881,24.858
NetC33_2: C33.2 U6.4 | length 3.8
  Top Layer 1 w0.2: C33.2 9.313,22.888 9.718,22.483 9.718,22.018 9.868,21.868 ; 9.868,21.867 10.318,21.417 U6.4
NetC34_2: C34.2 L1.1 U6.5 | length 6
  Top Layer 1 w0.3: U6.5 12.218,20.261 12.648,20.691 12.875,20.691 v1(12.913,20.729) 12.968,20.729 13.171,20.526 C34.2
  Bottom Layer 1 w0.3: L1.1 9.998,20.25 10.762,21.014 12.628,21.014 v1(12.913,20.729)
NetLED1_2: LED1.2 R3.2 | length 2.3
  Bottom Layer 1 w0.2: LED1.2 0.762,25.527 1.016,25.781 R3.2
NetP4_4: P4.4 R10.2 | length 5
  Top Layer 1 w0.2: v1(6.741,28.476) R10.2
  Bottom Layer 1 w0.2: P4.4 v1(6.741,28.476)
NetP4_10: P4.10 R11.2 | length 5
  Top Layer 1 w0.2: v1(9.741,28.476) R11.2
  Bottom Layer 1 w0.2: P4.10 v1(9.741,28.476)
NetQ1_3: Q1.3 U3.2 | length 8.1
  Top Layer 1 w0.2: Q1.3 13.888,5.107 14.062,5.281 v1(14.062,5.362)
  Top Layer 1 w0.3: U3.2 v1(19.204,3.515)
  Bottom Layer 2 w0.2: v1(14.062,5.362) 17.357,5.362 v1(19.204,3.515)
NetR5_2: R5.2 U3.3 | length 3.8
  Top Layer 1 w0.2: R5.2 18.443,5.299 18.634,5.108 18.634,3.711 18.504,3.581 U3.3
NetR6_2: R6.2 U2.6 | length 13.4
  Top Layer 1 w0.3: v1(14.063,17.234) 14.063,17.238 14.633,17.808 R6.2 ; v1(21.422,10.094) 21.477,10.094 21.689,9.882 U2.6
  Bottom Layer 2 w0.3: v1(14.063,17.234) 14.063,16.736 17.346,13.453 18.29,13.453 20.293,11.45 20.293,11.224 20.293,10.945 21.105,10.132 21.384,10.132 v1(21.422,10.094)
NetR7_2: R7.2 U2.7 | length 15.3
  Top Layer 1 w0.3: v1(21.428,10.794) 21.783,10.794 22.045,10.532 U2.7
  Bottom Layer 2 w0.3: v1(13.681,19.822) 14.697,18.806 14.697,16.809 17.553,13.953 18.497,13.953 20.793,11.657 20.793,11.152 21.112,10.832 21.39,10.832 v1(21.428,10.794)
  Bottom Layer 1 w0.3: v1(13.681,19.822) R7.2
NetR9_2: R9.2 U4.5 | length 4.4
  Top Layer 1 w0.2: R9.2 3.851,25.123 4.711,25.983 5.651,25.983 5.871,25.763 U4.5
NEXT: SW5.2 U1.4 | length 37
  Top Layer 1 w0.2: U1.4 6.418,7.96 6.501,8.042 v1(6.501,8.123)
  Top Layer 2 w0.2: v1(6.501,8.123) 7.757,6.867 14.65,6.867 19.901,12.117 23.386,12.117 23.804,12.535 24.635,12.535 25.552,13.452 25.552,16.713 v1(24.275,17.99)
  Bottom Layer 2 w0.2: v1(23.2,23.7) 23.85,23.05 23.85,22.524 24,22.374 24,19.297 24.216,19.081 24.216,18.64 24.218,18.638 24.218,18.047 v1(24.275,17.99)
  Bottom Layer 1 w0.2: v1(23.2,23.7) 23.2,24.459 23.3,24.559 SW5.2
OUT_L: C17.2 P3.1 R6.1 | length 4.7
  Top Layer 1 w0.3: R6.1 14.697,19.315 15.05,19.668 P3.1
  Bottom Layer 1 w0.3: C17.2 14.697,19.293 15.05,19.646 P3.1
OUT_R: C16.2 P3.2 R7.1 | length 5.7
  Top Layer 1 w0.3: C16.2 13.681,24.412 13.969,24.7 P3.2
  Bottom Layer 1 w0.3: R7.1 13.681,22.166 14.403,22.888 14.792,22.888 15.05,23.146 P3.2
PLAY: SW4.2 U1.2 | length 30.7
  Top Layer 1 w0.2: v1(5.368,8.164) 5.418,8.114 U1.2
  Top Layer 2 w0.2: v1(5.368,8.164) 5.877,8.673 6.728,8.673 8.135,7.267 14.485,7.267 19.735,12.517 23.221,12.517 23.638,12.935 24.469,12.935 25.152,13.617 25.152,16.254 v1(23.6,17.805)
  Bottom Layer 1 w0.2: SW4.2 23.3,17.506 v1(23.6,17.805)
RCC_OSC_IN: C7.1 U1.5 XTAL1.1 | length 6.4
  Top Layer 1 w0.2: C7.1 5.045,1.529 5.639,2.123 XTAL1.1@5.639,2.8 ; XTAL1.1 5.739,2.9 6.696,3.857 6.696,5.56 6.918,5.782 U1.5
RCC_OSC_OUT: C14.1 U1.6 XTAL1.2 | length 6.6
  Top Layer 1 w0.2: U1.6 7.418,5.783 7.839,5.362 7.839,4.473 8.066,4.473 8.855,3.684 8.855,2.084 8.55,1.78 C14.1
RESET: C6.2 P1.3 U1.7 | length 21.6
  Top Layer 1 w0.2: C6.2 3.267,6.632 v1(3.902,5.997) ; U1.7 7.918,7.727 v1(8.22,8.029)
  Bottom Layer 2 w0.2: v1(3.902,5.997) 6.188,5.997 v1(8.22,8.029)
  Bottom Layer 1 w0.2: v1(3.902,5.997) 3.902,8.576 5.595,10.269 5.595,12.192 7.637,14.234 7.637,16.848 7.077,17.408 P1.3
SD_DET: P2.9 U1.38 | length 18.8
  Top Layer 1 w0.2: v1(9.432,21.526) 9.432,20.54 9.718,20.254 9.718,19.437 9.918,19.237 U1.38
  Top Layer 2 w0.2: v1(9.432,21.526) 9.432,19.644 13.973,15.103 18.901,15.103 19.433,14.571 v1(19.433,14.553)
  Bottom Layer 1 w0.2: v1(19.433,14.553) P2.9
SDMMC1_CK: P2.5 U1.53 | length 14.4
  Top Layer 1 w0.2: U1.53 4.182,14.259 4.481,13.96 9.978,13.96 10.128,13.81 11.392,13.81 v1(12.196,13.006)
  Bottom Layer 1 w0.2: v1(12.196,13.006) 13.121,13.006 15.033,14.919 P2.5
SDMMC1_CMD: P2.3 U1.54 | length 14.4
  Top Layer 1 w0.2: U1.54 4.116,13.759 4.315,13.56 9.1,13.56 9.312,13.349 v1(9.368,13.349)
  Bottom Layer 1 w0.2: v1(9.368,13.349) 9.871,13.852 9.871,16.792 10.125,17.046 12.665,17.046 12.833,16.878 P2.3
SDMMC1_D0: P2.7 U1.34 | length 12.5
  Top Layer 1 w0.2: v1(11.068,20.414) 11.068,19.987 11.918,19.137 U1.34
  Top Layer 2 w0.2: v1(11.068,20.414) 11.068,19.344 14.128,16.284 15.96,16.284 v1(16.883,17.207)
  Bottom Layer 1 w0.2: v1(16.883,17.207) 16.883,17.153 17.233,16.803 P2.7
SDMMC1_D1: P2.8 U1.40 | length 13.4
  Top Layer 1 w0.2: U1.40 8.918,17.213 v1(9.298,16.833)
  Top Layer 2 w0.2: v1(9.298,16.833) 11.677,16.833 13.957,14.553 v1(18.674,14.553)
  Bottom Layer 1 w0.2: P2.8 18.333,14.894 v1(18.674,14.553)
SDMMC1_D2: P2.1 U1.51 | length 9
  Top Layer 1 w0.2: U1.51 4.313,15.259 4.812,14.76 v1(10.522,14.76)
  Bottom Layer 1 w0.2: v1(10.522,14.76) 10.522,14.841 10.633,14.952 P2.1
SDMMC1_D3: P2.2 U1.52 | length 10.4
  Top Layer 1 w0.2: U1.52 4.248,14.759 4.647,14.36 10.144,14.36 10.294,14.21 11.183,14.21 v1(11.733,14.76)
  Bottom Layer 1 w0.2: v1(11.733,14.76) P2.2
SPI3_MOSI: U1.57 U3.10 | length 17.3
  Top Layer 1 w0.2: U1.57 4.509,12.259 v1(4.541,12.227)
  Top Layer 1 w0.3: U3.10 v1(13.604,3.488)
  Bottom Layer 2 w0.2: v1(4.541,12.227) 7.648,12.227 10.818,9.056 10.818,6.504 13.546,3.776 13.546,3.573 v1@13.604,3.515
SPI3_SCK: U1.55 U3.9 | length 18.4
  Top Layer 1 w0.2: U1.55 3.768,13.259 4.156,12.871 v1(4.156,12.855)
  Top Layer 1 w0.3: U3.9 v1(14.304,3.584)
  Bottom Layer 2 w0.2: v1(4.156,12.855) 7.585,12.855 11.218,9.222 11.218,6.67 v1(14.304,3.584)
SWCLK: P1.1 U1.49 | length 2.8
  Top Layer 1 w0.2: U1.49 4.004,16.259 v1(4.283,16.538)
  Bottom Layer 1 w0.2: v1(4.283,16.538) P1.1
SWDIO: P1.2 U1.46 | length 2.7
  Top Layer 1 w0.2: v1(5.783,16.754) 5.783,16.835 5.918,16.97 U1.46
  Bottom Layer 1 w0.2: P1.2 5.731,17.757 5.731,16.805 v1(5.783,16.754)
TIM2_CH1: LED1.1 U1.50 | length 11
  Top Layer 1 w0.2: v1(1.595,21.168) 2.162,20.601 2.162,17.759 2.833,17.088 4.511,17.088 4.833,16.766 4.833,16.31 4.282,15.759 U1.50
  Bottom Layer 1 w0.2: LED1.1 0.762,21.59 1.184,21.168 v1(1.595,21.168)
TIM2_CH2: Q1.1 R8.2 U1.15 | length 3
  Top Layer 1 w0.2: R8.2 11.708,5.017 11.926,5.235 ; U1.15 11.918,5.243 11.926,5.235 ; Q1.1 11.926,5.235
USB_OTG_HS_DM: P4.5 P4.7 U1.44 | length 14.6
  Top Layer 1 w0.2: U1.44 6.918,16.951 7.061,16.808 7.061,16.484 v1(7.087,16.458)
  Bottom Layer 2 w0.2: v1(7.087,16.458) 7.067,16.478 7.067,24.062 v1(8.179,25.174)
  Bottom Layer 1 w0.2: P4.5 7.241,23.483 7.455,23.269 8.027,23.269 8.241,23.483 P4.7 8.241,25.031 8.179,25.093 v1(8.179,25.174)
USB_OTG_HS_DP: P4.6 P4.8 U1.45 | length 16
  Top Layer 1 w0.2: v1(6.389,16.403) 6.418,16.432 U1.45
  Bottom Layer 2 w0.2: v1(6.389,16.403) 6.392,16.406 6.392,16.788 6.667,17.063 6.667,24.548 v1(7.956,25.838)
  Bottom Layer 1 w0.2: P4.6 7.741,24.833 7.629,24.945 7.629,25.51 v1(7.956,25.838) 7.97,25.824 8.306,25.824 8.741,25.39 P4.8
VCAP_1: C15.2 U1.30 | length 2.7
  Top Layer 1 w0.3: U1.30 15.553,15.259 16.348,16.054 C15.2
VCAP_2: C23.2 U1.62 | length 2
  Top Layer 1 w0.3: C23.2 1.692,9.629 1.822,9.759 U1.62
VOL+: SW2.2 U1.10 | length 10.4
  Top Layer 1 w0.2: U1.10 9.418,7.703 v1(9.744,8.029)
  Bottom Layer 2 w0.2: v1(3.81,4.3) 6.777,4.3 9.744,7.267 v1(9.744,8.029)
  Bottom Layer 1 w0.2: SW2.2 v1(3.81,4.3)
VOL–: SW1.2 U1.9 | length 15.6
  Top Layer 1 w0.2: U1.9 8.918,7.609 8.978,7.669 v1(8.978,8.032)
  Top Layer 2 w0.2: v1(1.489,15.05) 1.519,15.05 2.505,14.064 2.505,11.204 4.029,9.68 7.347,9.68 8.978,8.049 v1(8.978,8.032)
  Bottom Layer 1 w0.2: v1(1.489,15.05) 1.519,15.05 2.7,13.869 SW1.2
pads on no net: P4. P4.3 P4.9 SW1. SW2. SW3. SW4. SW5. U1.8 U1.11 U1.16 U1.22 U1.25 U1.33 U1.35 U1.36 U1.37 U1.39 U1.56 U1.61 U4.1 XTAL1.0

## Polygon pours and split planes (outlines as drawn)
DGND on Bottom Layer 2 "GND_BOT" (solid, remove dead copper, pour order 1): 26,0 26,30 0,30 0,0
DGND on Top Layer 2 "GND_BOT" (solid, remove dead copper, pour order 2): 26,0 26,30 0,30 0,0
DGND on Top Layer 1 "GND_BOT" (solid, remove dead copper, pour order 3): 26,0 26,30 0,30 0,0
DGND on Bottom Layer 1 "GND_BOT" (solid, remove dead copper, pour order 0): 26,0 26,30 0,30 0,0

## Other copper
Bottom Layer 1:
  region net NetC30_2: 14.191,29.025 14.191,29.35 14.191,29.375 ccw(c13.61,28.825) 13.632,29.625 12.011,29.625 12.011,29.025
  region net NetC30_2: 1.791,29.025 1.791,29.35 1.791,29.375 cw(c2.372,28.825) 2.35,29.625 3.971,29.625 3.971,29.025

## Silkscreen, mask and mechanical layers (free items; w line width, h text height)
Bottom Overlay:
  text "uPlayer v3.1" at 12.827,20.923 h2.4
Bottom Paste:
  text "qsivey" at 8.324,19.533 h1.1
Bottom Solder:
  text "qsivey" at 8.324,19.533 h1.1
Board:
  lines w0.5: 0,18.808 0,3 ccw(c3,3) 3,0 23,0 ccw(c23,3) 26,3 26,18.808 ; 0,20.192 0,27 cw(c3,27) 3,30 15.7,30 15.7,17.8 17.5,17.8 18.167,17.4 20.033,17.4 20.7,17.8 22.5,17.8 22.5,30 ; 0.006,18.808 ccw(c0.5,19.5) 0.006,20.192 ; 25.994,18.808 cw(c25.5,19.5) 25.994,20.192 ; 26,20.192 26,27 ccw(c23,27) 23,30 22.5,30 ; 22.5,30 22.5,30
Top Draw:
  circle w0.2: c0.5,19.5 r1.4
  circle w0.2: c25.5,19.5 r1.4
  circle w0.2: c25.5,19.5 r0.85
  circle w0.2: c25.5,19.5 r2
  circle w0.2: c0.5,19.5 r0.85
  circle w0.2: c0.5,19.5 r2
  lines w0.5: 3,32 ccw(c3,27) -2,27 -2,3 ccw(c3,3) 3,-2 4.9,-2 ; 13,32 15.7,32 ; 21,-2 23,-2 ccw(c23,3) 28,3 28,27 ccw(c23,27) 23,32 22.5,32